# Altium PCB PCB1.PcbDoc
Units mil, origin at the board's own origin, x right, y up, seen from the top; angles counter-clockwise.
Board outline 1569.77 x 696.96 mil, 2 copper layers (Top Layer, Bottom Layer); 13 components, 12 nets, 48 pads, 7 vias.
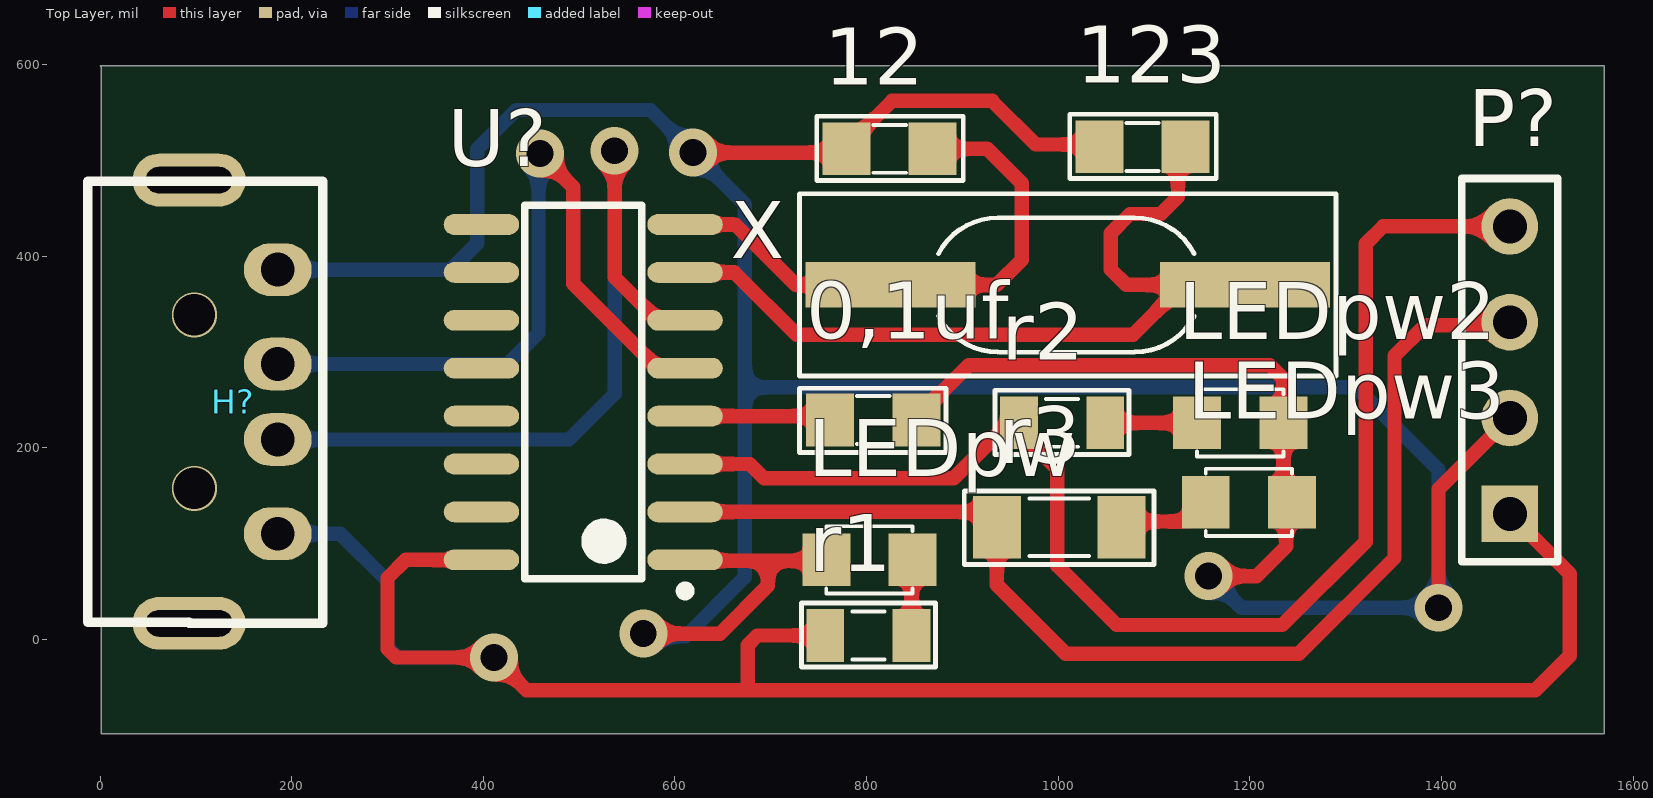
[diagram p0: Top Layer view]
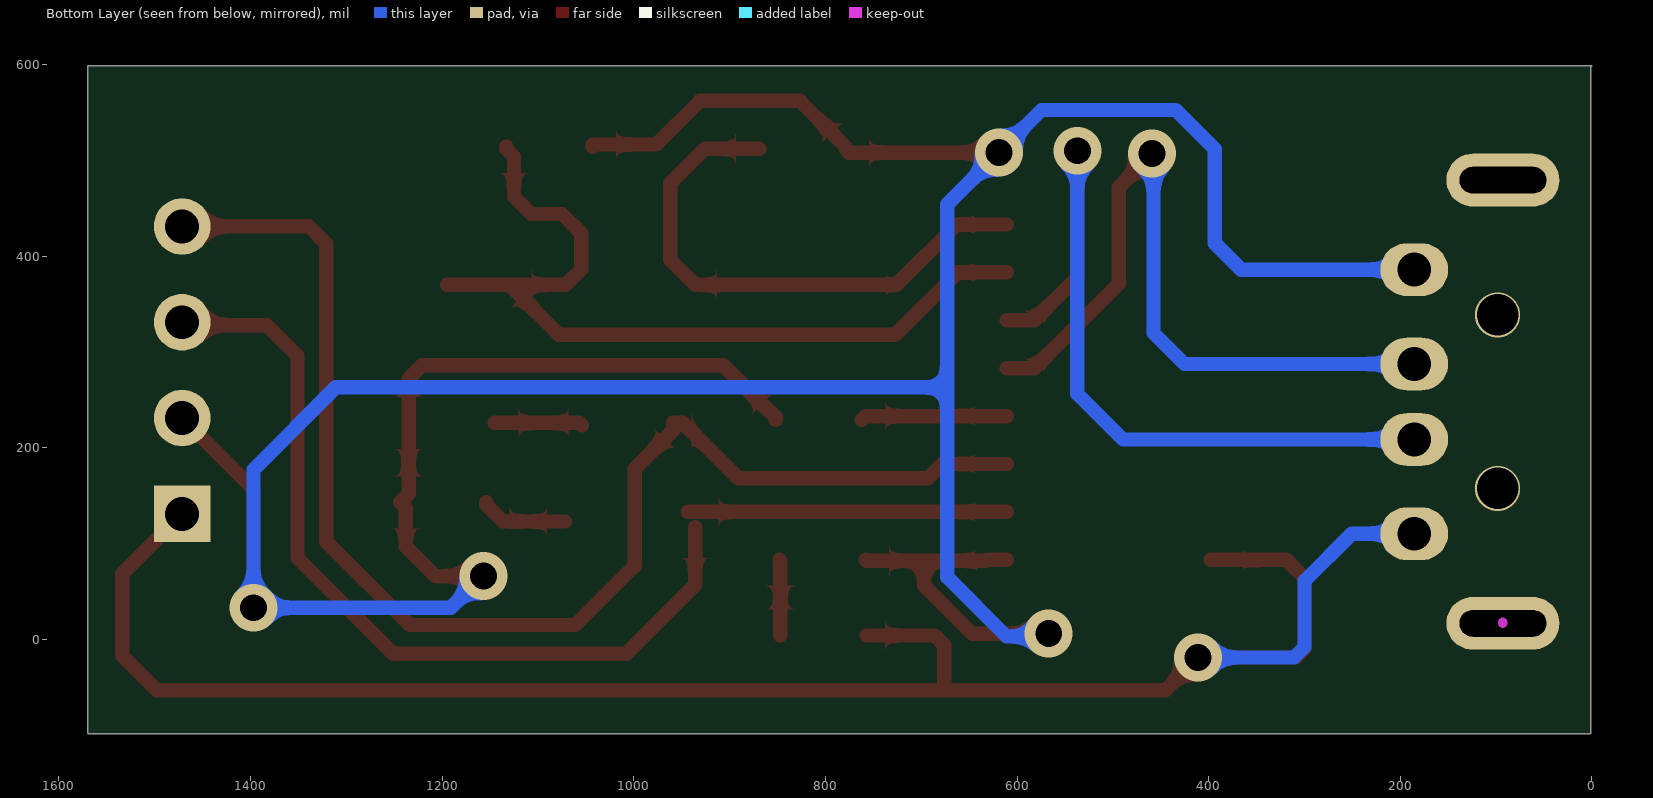
[diagram p1: Bottom Layer view, seen from below]

## Layer stack, top to bottom
Top Solder: solder mask 0.4, Solder Resist, Dk 3.5
Top Layer: signal copper 1.4
Dielectric 1: dielectric 12.6, FR-4, Dk 4.8
Bottom Layer: signal copper 1.4
Bottom Solder: solder mask 0.4, Solder Resist, Dk 3.5

## Board outline
1,-98.43 1,597.55 0.02,598.54 1569.79,598.54 1569.79,-98.43

## Design rules (kind name [scope] priority, off if disabled: settings)
Clearance [All] p1: gap=10 ignorepadtopadclearanceinfootprint=FALSE except(0: Arc-Hole Track-Hole SMDPad-Hole THPad-Hole Via-Hole Fill-Hole Poly-Hole Region-Hole Text-Hole)
PolygonConnect [All] p1: connectstyle=Relief reliefconductorwidth=10 reliefentries=4 polygonreliefangle="90 Angle" airgapwidth=10
RoomDefinition Sheet1 [InComponentClass('Sheet1')] p1: confinementstyle=ConfineIn formatcopy=TRUE lockcomponents=FALSE outline 2015,55 4122,55 4122,1000 2015,1000
RoutingVias [All] p1: holewidth=28 width=50 viastyle="Through Hole" minholewidth=28 minwidth=50 maxholewidth=28 maxwidth=50
SolderMaskExpansion [All] p1: expansion=4
Width [All] p1: maxlimit=50 minlimit=10 preferedwidth=15
30 further rules are at their usual default settings.

## Components (designator, comment, footprint, x,y, rotation, side; value= is the part's Value field where it differs from the comment)
0,1uf "Tu 0805" "Tu 0805" 807,229 r0 top
12 "Tu 0805" "Tu 0805" 824,512 r180 top
123 "Tu 0805" "Tu 0805" 1088,514 r180 top
H? "USB_MH" USB-A-RA 182.28,248.03 r270 top
LEDpw "LED" LED-0805-Blue 848,83 r180 top value="LED 3 - 5 ly 2 Colour"
LEDpw2 "LED" LED-0805-Green 1145,226 r0 top value="LED 3 - 5 ly 2 Colour"
LEDpw3 "LED" LED-0805-Orange 1154,143 r0 top value="LED 3 - 5 ly 2 Colour"
P? "Header 4" HDR1X4 1471.36,131 r90 top
r1 "1k5" RES-SMD-0805 802,4 r180 top
r2 "1k5" RES-SMD-0805 1004,226 r180 top
r3 "1k5" RES-SMD-1206 1001,117 r180 top
U? "CH340G" SO16 504.3,258 r180 top
X "12Mhz" XT2-SMD 1015,370 r0 top value=4Mhz

## Footprints (in the part's own frame and the unit in brackets; to place one, negate y for a bottom-side part, rotate by r counter-clockwise, add the part's x,y. Pads: shape width x height; smd on the part's side, far side on the other; paste and mask are expansions set on the pad)
HDR1X4 [mm] "Connector; Header; 4 Position"
  rect 1.5x1.5 hole 0.9: 1(0,0)
  round 1.5 hole 0.9: 2(2.54,0) 3(5.08,0) 4(7.62,0)
  silkscreen extent -1.27,-1.27 8.89,1.27
LED-0805-Blue [mil]
  rect 50x55 smd: 1(0,0) 2(90,0)
  silkscreen extent 0,-35 90,35, body extent 5,-25 85,25, height 43
LED-0805-Green [mil]
  rect 50x55 smd: 1(0,0) 2(90,0)
  silkscreen extent 0,-35 90,35, body extent 5,-25 85,25, height 43
LED-0805-Orange [mil]
  rect 50x55 smd: 1(0,0) 2(90,0)
  silkscreen extent 0,-35 90,35, body extent 5,-25 85,25, height 43
RES-SMD-0805 [mil]
  rect 39.37x55 smd: 1(-45,0) 2(45,0)
  silkscreen extent -70,-34 70,33, body extent -39,-25 39,25, height 31
RES-SMD-1206 [mil]
  rect 50x65 smd: 1(-65,0) 2(65,0)
  silkscreen extent -99,-38 99,39, body extent -63,-31 63,32, height 40
SO16 [mm] "SOIC, 16-Leads, Body 9.90x3.91mm, Pitch 1.27mm, IPC Medium Density"
  oval 2x0.55 smd: 1(-2.7,4.445) 2(-2.7,3.175) 3(-2.7,1.905) 4(-2.7,0.635) 5(-2.7,-0.635) 6(-2.7,-1.905) 7(-2.7,-3.175) 8(-2.7,-4.445) 9(2.7,-4.445) 10(2.7,-3.175) 11(2.7,-1.905) 12(2.7,-0.635) 13(2.7,0.635) 14(2.7,1.905) 15(2.7,3.175) 16(2.7,4.445)
  silkscreen extent -2.83,-4.95 1.55,5.39, body extent -3,-4.95 3,4.95, height 1.4
"Tu 0805" [mil] "Compoment SMD 80x50mil"
  rect 50x55 smd: 1(-45,0) 2(45,0)
  silkscreen extent -77,-34 76,33, body extent -40,-27 40,23, height 24
USB-A-RA [mm] "USB Type A"
  oval 1.4x1.8 hole 0.9: 1(3.5,0.08) 2(1,0.08) 3(-1,0.08) 4(-3.5,0.08)
  oval 1.4x3 hole 0.7 slot 2.3 at 90 deg: HOLE(-5.875,-2.27) HOLE(5.875,-2.27)
  round 1.2 hole 1.1: HOLE(-2.3,-2.13) HOLE(2.3,-2.13)
  Keep-Out Layer lines w0.254: 5.875,-2.27 5.842,-2.27
  silkscreen extent -5.84,-4.95 5.87,1.27, body extent -6.25,-19.8 6.25,0.23, height 2.18
XT2-SMD [mm]
  rect 4.5x1.2 smd: 1(-4.826,0) 2(4.572,0)
  silkscreen extent -7.24,-2.41 6.99,2.41, body extent -6.53,-2.41 6.27,2.42, height 4.3

## Part data
0,1uf 12 123: library part "CAP 0805"
H?: "USB conector"
LEDpw LEDpw2 LEDpw3: library part "LED SMD"
P?: "Header, 4-Pin", LatestRevisionDate=17-Jul-2002, LatestRevisionNote="Re-released for DXP Platform.", Publisher="Altium Limited"
r1 r2 r3: library part Res-SMD, "Resistor", Manufacturer="Generic Components", Class=Passive, Published=08/06/2000, Publisher="Altium Hobart Technology Centre"
U?: "High and Low Side Driver", ComponentLink1Description="Manufacturer Link", ComponentLink1URL=http://www.irf.com/, ComponentLink2Description=Datasheet, ComponentLink2URL=http://www.irf.com/product-info/datasheets/data/ir2110.pdf, DatasheetVersion=PD60147J, LatestRevisionDate=04-Mar-2005, LatestRevisionNote="Stylized 3D Model Added.", Note="Pins 4, 8 and 14 are not connected", PackageDescription="DIP; 14 Leads; Row Spacing 7.62 mm; Pitch 2.54 mm", PackageReference=PDIP14, Published=8-Jun-2000, Publisher="Altium Limited"
X: library part XT2, "Crystal, 32.768 KHz, -40 to 85 degC, 3.2 x 1.5 x 0.9 mm SMD"

## Via types
v1: diameter 50, hole 28, Top Layer to Bottom Layer, 7 vias

## Nets (pads, with @x,y where several pads share a name; then routed paths per layer and width w, separated by ;. In a path a pad name is that pad's centre, name@x,y a point inside that pad or via, vN(x,y) a via of type N, cw(c..) or ccw(c..) an arc to the next point about the centre after c; other vN are vias at no path point)
5V: H?.1 P?.1 r1.2 U?.16 | length 2073.9
  Top Layer w15: U?.16 319,83 300,64 300,-10 309,-19 v1(411,-19) 445,-53 672,-53 ; r1.2 686,4 676,-6 676,-49 672,-53 ; P?.1 1534,68.36 1534,-17 1498,-53 672,-53
  Bottom Layer w15: H?.1 250.76,110.24 300,61 300,-8 311,-19 v1(411,-19)
GND: 0,1uf.2 12.2 123.2 H?.4 LEDpw2.2 LEDpw3.2 LEDpw.2 P?.2 U?.1 | length 4046.4
  Top Layer w15: v1(567,6) 647,6 697,56 697,82 ; U?.1 631,83 632,82 697,82 ; v1(619,508) 775,508 12.2 779,514 790,525 790,525.5 826.5,562 931,562 976.5,516.5 1043,516.5 123.2 ; LEDpw.2 757,82 697,82 ; 852,229 852,232 858,238 858.5,238 906.5,286 1221,286 1235,272 LEDpw2.2 1235,152 LEDpw3.2 1238,137 1238,97 1207,66 v1(1157,66) ; v1(1397,33) 1397,156.64 P?.2
  Bottom Layer w15: H?.4 366.14,385.83 393.7,413.39 393.7,511.81 434.39,552.5 574.5,552.5 v1(619,508) 673,454 673,263 ; v1(567,6) 570,3 611,3 673,65 673,263 ; v1(1157,66) 1158.18,66 1191.18,33 v1(1397,33) 1397,177 1311,263 673,263
Net0,1uf_1: 0,1uf.1 U?.4 | length 153.1
  Top Layer w15: U?.4 758,233 762,229
Net12_1: 12.1 U?.8 X.1 | length 576.2
  Top Layer w15: U?.8 663,433 726,370 X.1 936,370 962,396 962,476 926,512 12.1
Net123_1: 123.1 U?.7 X.2 | length 893.6
  Top Layer w15: U?.7 662,383 727,318 1078.04,318 X.2@1130.04,370 ; 123.1 1133,512 1125,504 1125,462 1107,444 1075,444 1055,424 1055,386 1071,370 X.2@1130.04,370 ; X.2 X.2@1130.04,370
NetH?_2: H?.2 U?.6 | length 849.3
  Top Layer w15: v1(537,510) 537,378.06 582.06,333 U?.6
  Bottom Layer w15: H?.2 489.47,208.66 537,256.19 v1(537,510)
NetH?_3: H?.3 U?.5 | length 776.9
  Top Layer w15: v1(459,507) 494,472 494,371.06 582.06,283 U?.5
  Bottom Layer w15: H?.3 425.2,287.4 457.6,319.8 457.6,505.6 v1(459,507)
NetLEDpw2_1: LEDpw2.1 r2.1 | length 91.7
  Top Layer w15: r2.1@1054.32,223.5 1056.82,226 LEDpw2.1
NetLEDpw3_1: LEDpw3.1 r3.1 | length 91.7
  Top Layer w15: r3.1@1072,123 1136.5,123 1154,140.5 LEDpw3.1
NetLEDpw_1: LEDpw.1 r1.1 | length 79.4
  Top Layer w15: r1.1 847,82 LEDpw.1
RX: P?.4 r2.2 U?.3 | length 1396.7
  Top Layer w15: U?.3 678,183 693,168 891,168 949,226 r2.2 959,218.19 999,178.19 999,77 1061,15 1234,15 1321,102 1321,413 1339,431 P?.4
TX: P?.3 r3.2 U?.2 | length 1225.3
  Top Layer w15: U?.2 r3.2@943.82,133 ; r3.2 936,57 1008,-15 1251,-15 1351,85 1351,296 1383,328 1468.36,328 P?.3
pads on no net: H?.HOLE U?.9 U?.10 U?.11 U?.12 U?.13 U?.14 U?.15

## Silkscreen, mask and mechanical layers (free items; w line width, h text height)
Drill Drawing:
  lines w10: 0.02,598.54 1569.79,598.54 1569.79,-98.43 1,-98.43 1,597.55